# EAGLE board Arduino_Shield_6_5_19_REV4 (EAGLE 9.3.1)
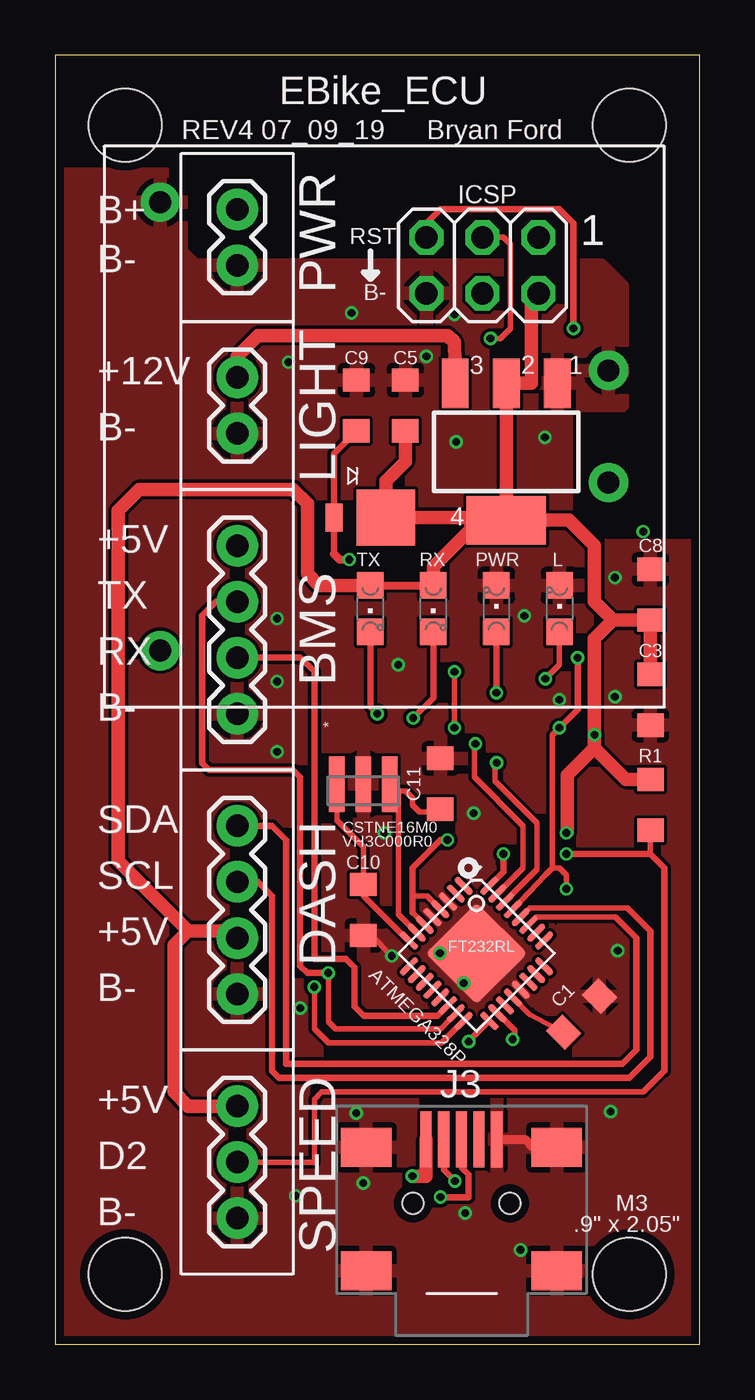
[diagram p0: board, top side]
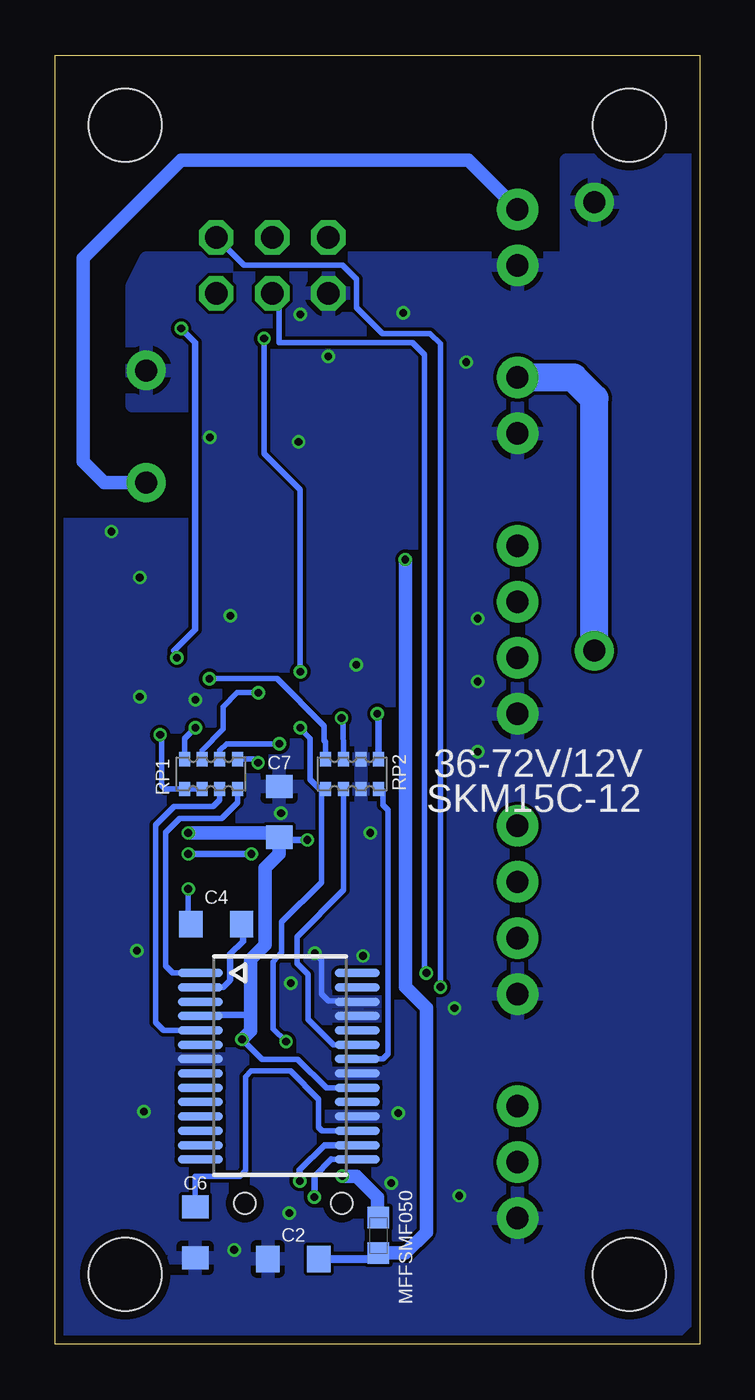
[diagram p1: board, bottom side, seen from below]

Size 29.21 x 58.42 mm. Coordinates in mm from the lower left corner, seen from the top.
Outline: 0,0 29.21,0 29.21,58.42 0,58.42 0,0
Copper layers (1*16): Top 0.035559375mm / dielectric 1.6mm / Bottom 0.035559375mm
Design rules "oshpark-2layer *": minimum track width 6mil, minimum drill 10mil, track to track 6mil, track to pad 6mil, pad to pad 6mil, via to via 6mil, smd to smd 6mil, copper to edge 15mil, drill to drill 6mil, minimum pad ring 5mil, minimum via ring 5mil, stop-mask expansion 2.5mil, vias tented up to drill 0mil, thermal gap 10mil
Net classes: 1 POWER: width 0.762 mm, clearance 0.762 mm
Holes 3.3 mm at 3.17,55.24 3.17,3.17 26.04,3.17 26.04,55.24

## Footprints (pad centres in the part's own frame; a part is rotated, then mirrored left to right if it is on the bottom)
0805 = smd 1.054 x 1.2: 1 -1.154,0; 2 1.154,0
1X04 = drill 1.016 pad 1.88: 1 0,0; 2 2.54,0; 3 5.08,0; 4 7.62,0
1X03 = drill 1.016 pad 1.88: 1 0,0; 2 2.54,0; 3 5.08,0
1X02 = drill 1.016 pad 1.88: 1 0,0; 2 2.54,0
SCHOTTKY_DIODE_DO220AAL = smd 2.667 x 2.54: P$1 -0.7,0 | smd 0.762 x 1.27: P$2 1.65,0
0603 = smd 0.95 x 1: 1 -0.8,0; 2 0.8,0
USB_SSOP28 = smd 0.381 x 2.032: 1 0,0; 2 0.65,0; 3 1.3,0; 4 1.95,0; 5 2.6,0; 6 3.25,0; 7 3.9,0; 8 4.55,0; 9 5.2,0; 10 5.85,0; 11 6.5,0; 12 7.15,0; 13 7.8,0; 14 8.45,0; 15 8.45,7.112; 16 7.8,7.112; 17 7.15,7.112; 18 6.5,7.112; 19 5.85,7.112; 20 5.2,7.112; 21 4.55,7.112; 22 3.9,7.112; 23 3.25,7.112; 24 2.6,7.112; 25 1.95,7.112; 26 1.3,7.112; 27 0.65,7.112; 28 0,7.112
LINEAR_VREG_SOT223 = smd 1.219 x 2.235: 1 -2.311,-3.099; 2 0,-3.099; 3 2.311,-3.099 | smd 3.6 x 2.2: 4 0,3.099
VQFN32 = smd 1.016 x 0.279: 1 -2.577,1.75; 2 -2.577,1.25; 3 -2.577,0.75; 4 -2.577,0.25; 5 -2.577,-0.25; 6 -2.577,-0.75; 7 -2.577,-1.25; 8 -2.577,-1.75; 17 2.577,-1.75; 18 2.577,-1.25; 19 2.577,-0.75; 20 2.577,-0.25; 21 2.577,0.25; 22 2.577,0.75; 23 2.577,1.25; 24 2.577,1.75 | smd 0.279 x 1.016: 9 -1.75,-2.577; 10 -1.25,-2.577; 11 -0.75,-2.577; 12 -0.25,-2.577; 13 0.25,-2.577; 14 0.75,-2.577; 15 1.25,-2.577; 16 1.75,-2.577; 25 1.75,2.577; 26 1.25,2.577; 27 0.75,2.577; 28 0.25,2.577; 29 -0.25,2.577; 30 -0.75,2.577; 31 -1.25,2.577; 32 -1.75,2.577 | smd 3.254 x 3.254: 33 0,0
USB-MINI-B_2 = smd 0.508 x 2.54: 1 0,0; 2 0.8,0; 3 1.6,0; 4 2.4,0; 5 3.2,0 | smd 2.286 x 1.778: 6 -2.717,5.948; 7 -2.717,0.36; 8 5.918,0.36; 9 5.918,5.948 | hole 0.95: -0.6,2.9; 3.8,2.9
2X03 = drill 1.016 pad 1.55 octagon: 1 -2.54,-1.27; 2 -2.54,1.27; 3 0,-1.27; 4 0,1.27; 5 2.54,-1.27; 6 2.54,1.27
LED_0805 = smd 1.2 x 1.2: A 0,-1.05; C 0,1.05
CRISTALLI_RESONATOR = smd 0.7 x 2.5: 1 -1.2,-0.3; 2 0,-0.3; 3 1.2,-0.3
RESISTOR_ARRAY_CAY16 = smd 0.5 x 0.65: 1 -1.2,-0.675; 2 -0.4,-0.675; 3 0.4,-0.675; 4 1.2,-0.675; 5 1.2,0.675; 6 0.4,0.675; 7 -0.4,0.675; 8 -1.2,0.675
SKM15C-12_DCDC = drill 1 pad 1.778: +VIN 10.16,2.54; +VOUT 2.54,22.86; -VIN 15.24,2.54; -VOUT 22.86,22.86

## Placement (x,y rotation side)
C1  100nF  [0805]  23.86,14.96 45 top
C2  4.7uF_16V  [0805]  18.41,3.87 180 bottom
C3  1uF  [0805]  26.99,29.21 270 top
C4  100nF  [0805]  21.91,19.05 0 bottom
C5  4,7uF_16V  [0805]  15.88,42.55 90 top
C6  100nf  [0805]  22.86,5.08 270 bottom
C7  1uF  [0805]  19.05,24.13 90 bottom
C8  1uF  [0805]  26.99,33.97 90 top
C9  100nF  [0805]  13.65,42.55 90 top
C10  22pF  [0805]  13.97,19.68 270 top
C11  22pF  [0805]  17.46,25.4 90 top
CXTR_BMS  4PIN_.1"_CONNECTOR  [1X04]  8.26,36.2 270 top
CXTR_DASH  4PIN_.1"_CONNECTOR  [1X04]  8.26,15.88 90 top
CXTR_HALL_SENSOR  3PIN_.1"_CONNECTOR  [1X03]  8.26,10.79 270 top
CXTR_HEADLIGHT  2PIN_.1"_CONNECTOR  [1X02]  8.26,41.27 90 top
CXTR_POWER  2PIN_.1"_CONNECTOR  [1X02]  8.26,48.9 90 top
D1  SS1P3L  [SCHOTTKY_DIODE_DO220AAL]  14.29,37.47 180 top
F1  MF-FSMF050X-2  [0603]  14.55,4.94 90 bottom
IC1  FT232RL  [USB_SSOP28]  22.63,16.83 270 bottom
IC2  LM1117IMPX-5.0  [LINEAR_VREG_SOT223]  20.45,40.45 180 top
IC3  328P-MUR  [VQFN32]  19.1,17.72 315 top
J3  UJ2-MBH-1-SMT-TR  [USB-MINI-B_2]  20.02,9.28 180 top
J4  [2X03]  19.37,48.9 180 top
L  Green  [LED_0805]  22.86,33.34 0 top
PWR  Green  [LED_0805]  20,33.34 0 top
R1  4.99  [0805]  26.99,24.45 90 top
RESONATOR  CSTNE16M0VH3C000R0  [CRISTALLI_RESONATOR]  13.97,25.08 180 top
RP1  1K  [RESISTOR_ARRAY_CAY16]  22.15,25.84 180 bottom
RP2  1K  [RESISTOR_ARRAY_CAY16]  15.75,25.84 0 bottom
RX  Green  [LED_0805]  17.14,33.34 180 top
TX  Green  [LED_0805]  14.29,33.34 180 top
U$2  SKM15C-12_DCDC  [SKM15C-12_DCDC]  27.62,28.89 90 top

## Library data of the parts
C1 C4 C6 C9 = EBike_Project_Library; DESCRIPTION: Multilayer Ceramic Capacitors MLCC - SMD/SMT 0805 50V 0.1uF 10% X7R AEC-Q200; LINK: https://www.mouser.com/ProductDetail/Taiyo-Yuden/UMK212B7104KGHT?qs=sGAEpiMZZMs0AnBnWHyRQNbg85K4ab%2F3SCTzhAxY5ms%3D; PACKAGE: 0805; PART_NUMBER: UMK212B7104KGHT; PRICE: 0.073
C2 C5 = EBike_Project_Library; DESCRIPTION: Tantalum Capacitors - Solid SMD 16volts 4.7uF 20% Molded Case, 0805; LINK: https://www.mouser.com/ProductDetail/Vishay-Sprague/TMCP1C475MTRF?qs=sGAEpiMZZMuEN2agSAc2prL8TSVBEr4qhfGzNWmpY58%252BLcjxpCNYUg%3D%3D; PART_NUMBER: TMCP1C475MTRF; PRICE: 0.62
C3 C7 C8 = EBike_Project_Library; DESCRIPTION: Multilayer Ceramic Capacitors MLCC - SMD/SMT CGA 0805 16V 1uF X7R 10% AEC-Q200; LINK: https://www.mouser.com/ProductDetail/TDK/CGA4J2X7R1C105K125AA?qs=sGAEpiMZZMs0AnBnWHyRQEWjzA2rN6H9wYlJX5ghAes%3D; PACKAGE: 0805; PART_NUMBER: CGA4J2X7R1C105K125AA; PRICE: 0.08
C10 C11 = EBike_Project_Library; DESCRIPTION: Multilayer Ceramic Capacitors MLCC - SMD/SMT 0805 22pF 50volts C0G 2%; LINK: https://www.mouser.com/ProductDetail/Vishay-Vitramon/VJ0805A220GXACW1BC?qs=sGAEpiMZZMs0AnBnWHyRQGuekufMepD5iWN0yuUza%2Fg%3D; PACKAGE: 0805; PART_NUMBER: VJ0805A220GXACW1BC; PRICE: 0.19
CXTR_BMS CXTR_DASH = EBike_Project_Library; DESCRIPTION: Headers & Wire Housings VERTICAL HDR 4P single row; LINK: https://www.mouser.com/ProductDetail/Molex/70543-0003?qs=%2Fha2pyFaduhkrELsSyc%252BzEvQtAM%2F8u3WZn5u47QKSoI%3D; PART_NUMBER: 70543-0003; PRICE: 0.99
CXTR_HALL_SENSOR = EBike_Project_Library; DESCRIPTION: Headers & Wire Housings VERTICAL HDR 3P single row; LINK: https://www.mouser.com/ProductDetail/Molex/70543-0002?qs=sGAEpiMZZMtVoztFdqDXO7H2KtVwxa9m; PART_NUMBER: 70543-0002; PRICE: 0.92
CXTR_HEADLIGHT CXTR_POWER = EBike_Project_Library; DESCRIPTION: Headers & Wire Housings VERTICAL HDR 2P single row; LINK: https://www.mouser.com/ProductDetail/Molex/70543-0001?qs=sGAEpiMZZMtVoztFdqDXOwZ%252B3K3gi96X; PART_NUMBER: 70543-0001; PRICE: 0.84
D1 = EBike_Project_Library; DESCRIPTION: 1A 30V Schottky Barrier Rectifiers -SS1P3L-M3/84A; LINK: https://www.mouser.com/ProductDetail/Vishay-Semiconductors/SS1P3L-M3-84A?qs=sGAEpiMZZMtQ8nqTKtFS%2FDwK3YsqAmRDX68SX%2Fa33dQ%3D; PACKAGE: DO220AAL; PART_NUMBER: SS1P3L-M3/84A; PRICE: 0.44
F1 = EBike_Project_Library; DESCRIPTION: Resettable Fuses - PPTC 6volts 40amps. Trip: 1 Amp; LINK: https://www.mouser.com/ProductDetail/Bourns/MF-FSMF050X-2?qs=%2Fha2pyFaduhY1ZPPOVrCdcS5aENsc7ePUQjWSxVAdbE%3D; PACKAGE: 0603; PART_NUMBER: MF-FSMF050X-2; PRICE: 0.8
IC1 = EBike_Project_Library; DESCRIPTION: USB to serial UART interface -FT232RL; LINK: https://www.mouser.com/ProductDetail/FTDI/FT232RL-REEL?qs=sGAEpiMZZMs5ceO8zL%252BTxyQLQIH6hE7q; PACKAGE: SSOP28; PART_NUMBER: FT232RL; PRICE: 4.5
IC2 = EBike_Project_Library; DESCRIPTION: LDO Voltage Regulators 800MA; LINK: https://www.mouser.com/ProductDetail/Texas-Instruments/LM1117IMPX-50-NOPB?qs=sGAEpiMZZMsGz1a6aV8DcCERHZHPu4lvRjG0WFCuZBk%3D; PACKAGE: SOT-223-4; PART_NUMBER: LM1117IMPX-5.0/NOPB; PRICE: 1.1
IC3 = EBike_Project_Library; DESCRIPTION: ATMEGA328P 8-bit Microcontroller with 32KBytes In-System Programmable Flash ATMEGA328P-AU; LINK: https://www.mouser.com/ProductDetail/Microchip-Technology-Atmel/ATMEGA328P-MUR?qs=6Dg1WZIWLC7u6Xm9ddn7Uw%3D%3D&gclid=CjwKCAjw04vpBRB3EiwA0IieaksvOVTdJjfP02M7Zuqh5oYF5-gaqRzNhihrY83d8rV5YqceIOQAwRoCJZYQAvD_BwE; PACKAGE: VQFN32; PART_NUMBER: ATMEGA328P-MUR; PRICE: 2.14
J3 = EBike_Project_Library; DESCRIPTION: USB Connectors USB 2.0 mini B jack 5 pin Horizontal SMT; LINK: https://www.mouser.com/ProductDetail/CUI/UJ2-MBH-1-SMT-TR?qs=sGAEpiMZZMulM8LPOQ%252Byk%252Br6FietFiXBYOK8b9%2FsuNIy0pbKqeLWLA%3D%3D; PACKAGE: USB-MINI-B_2; PART_NUMBER: UJ2-MBH-1-SMT-TR; PRICE: 0.49
J4 = EBike_Project_Library; DESCRIPTION: 2X03 Array of 0.1" Headers
L PWR RX TX = EBike_Project_Library; DESCRIPTION: LED GREEN - SMD-0805; LINK: https://www.mouser.com/ProductDetail/Kingbright/APT2012CGCK?qs=sGAEpiMZZMseGfSY3csMkfJS7xWFNN5n7tzB45f%252BgXY%3D; PACKAGE: 0805; PART_NUMBER: APT2012CGCK; PRICE: 0.176
R1 = EBike_Project_Library; DESCRIPTION: Thick Film Resistors 1/8Watt 4.99Kohms 1% Commercial Use; LINK: https://www.mouser.com/ProductDetail/Vishay-Dale/CRCW08054K99FKEAC?qs=sGAEpiMZZMvdGkrng054t0DrEhLhGh8g%2F7ymnn7FEGW0GG%2FpsF6WEQ%3D%3D; PACKAGE: 0805; PART_NUMBER: CRCW08054K99FKEAC; PRICE: 0.1
RESONATOR = EBike_Project_Library; DESCRIPTION: Resonators 16.0000MHz 15pF SMD CHP Rsntr 0.07% AUTO; LINK: https://www.mouser.com/ProductDetail/Murata-Electronics/CSTNE16M0VH3C000R0?qs=sGAEpiMZZMsBj6bBr9Q9aVicrFFkOfIYpHW0AbRuFJ01rdD3nNN31g%3D%3D; PACKAGE: CUSTOM; PART_NUMBER: CSTNE16M0VH3C000R0; PRICE: 0.44
RP1 RP2 = EBike_Project_Library; DESCRIPTION: Resistor Networks & Arrays 1K 5% Convex 4resistors; LINK: https://www.mouser.com/ProductDetail/Bourns/CAY16-102J4LF?qs=%2Fha2pyFadug6W1fYoV%2Fz5iiiJqpMP3MDh5o065QEQ1wMYAScZ%252BDqEQ%3D%3D; PACKAGE: CAY16; PART_NUMBER: CAY16-102J4LF; PRICE: 0.1
U$2 = EBike_Project_Library; DESCRIPTION: Isolated DC/DC Converters 15W 36-75Vin 12Vout 125-1250mA 1x1 size; LINK: https://www.mouser.com/ProductDetail/MEAN-WELL/SKM15C-12?qs=%2Fha2pyFaduhh55LLYaK%2FKJ2VcEvgwt5xUEx7a8eNZIE%3D; PART_NUMBER: SKM15C-12; PRICE: 25.44

## Nets
3V3: C6.1 IC1.17
+5V: C3.1 C5.1 C7.1 C8.1 CXTR_DASH.2 CXTR_HALL_SENSOR.1 D1.P$1 IC1.4 IC1.20 IC2.2 IC2.4 IC3.4 IC3.6 IC3.18 J4.2 R1.2 RP1.5 RP1.6 RX.A TX.A
+12V: CXTR_HEADLIGHT.2 IC2.3 U$2.+VOUT
AREF: C1.1 IC3.20
B+: CXTR_POWER.2 U$2.+VIN
B-_ECU: C1.2 C2.2 C3.2 C5.2 C6.2 C7.2 C8.2 C9.2 C10.2 C11.2 CXTR_BMS.4 CXTR_DASH.1 CXTR_HALL_SENSOR.3 CXTR_HEADLIGHT.1 CXTR_POWER.1 IC1.7 IC1.18 IC1.21 IC1.25 IC1.26 IC2.1 IC3.3 IC3.5 IC3.21 IC3.33 J3.1 J3.6 J3.7 J3.8 J3.9 J4.6 L.C PWR.C RESONATOR.2 RP2.3 RP2.6 U$2.-VIN U$2.-VOUT
D0/RX: IC3.30 RP1.1
D1/TX: IC3.31 RP1.2
D2_HALL: CXTR_HALL_SENSOR.2 IC3.32 R1.1
D12/MISO: IC3.16 J4.1
D13/SCK: IC3.17 J4.3 RP2.1
LCD_SCL_BLUE_A5: CXTR_DASH.3 IC3.28
LCD_SDA_GREEN_A4: CXTR_DASH.4 IC3.27
N$4: C4.2 IC1.2
N$7: IC1.15 J3.3
N$8: IC1.16 J3.4
N$10: PWR.A RP1.3
N$12: IC1.23 RP2.2
N$13: IC1.22 RP2.4
N$14: C11.1 IC3.7 RESONATOR.1
N$18: L.A RP2.8
N$19: RP2.5 TX.C
N$20: C10.1 IC3.8 RESONATOR.3
N$26: F1.2 J3.5
N$29: RP2.7 RX.C
RESET: C4.1 IC3.29 J4.5 RP1.4
RX: IC1.1 RP1.8
RX_NANO_D10: CXTR_BMS.3 IC3.14
TX: IC1.5 RP1.7
TX_NANO_D11: CXTR_BMS.2 IC3.15 J4.4
VUSB: C2.1 C9.1 D1.P$2 F1.1

## Tracks (layer width: path | path; a pad name or v marks a point on that pad's centre or on a via)
3V3
  Bottom 0.254: IC1.17 17.11,9.68 17.27,9.84 17.27,11.11 18.54,12.38 20.32,12.38 20.57,12.13 20.57,7.87 20.83,7.62 22.86,7.62 C6.1
+5V  (via drill 0.35 pad 0.6)
  Top 0.254: v20.74,13.82 20.84,13.92 20.84,14.22 20.05,15.01 IC3.18 | IC3.6 | IC3.6 16.19,19.56 | IC3.4 16.85,20.32 16.19,20.32
  Top 0.305: 16.19,19.56 16.19,20.32 16.19,21.59 17.46,22.86 v17.78,22.86
  Top 0.356: TX.A RX.A
  Top 0.61: 24.45,27.03 23.22,25.79 23.22,23.22 v23.18,23.18 | 24.45,27.03 v24.45,27.62 24.45,31.98 25.28,32.82 | IC2.4 23.29,37.35 24.45,36.2 24.45,33.66 25.28,32.82 | IC2.4 18.85,37.35 | 18.85,37.35 18.85,36.94 17.14,35.24 RX.A | IC2.4 IC2.2 21.59,43.55 21.59,47.31 J4.2 | 6.03,18.73 2.86,21.91 2.86,37.78 3.81,38.73 10.79,38.73 11.43,38.1 11.43,34.92 11.97,34.39 TX.A | CXTR_DASH.2 7.94,18.73 6.03,18.73 | 6.03,18.73 5.4,18.1 5.4,11.43 6.03,10.79 CXTR_HALL_SENSOR.1 | C3.1 C8.1 25.28,32.82 | 24.45,27.03 25.87,25.6 R1.2 | 18.85,37.35 18.73,37.47 D1.P$1 14.99,39.12 15.88,40.01 C5.1
  Bottom 0.254: v24.45,27.62 24.38,27.56 24.38,25.34 24.22,25.17 RP1.5 RP1.6 | IC1.20 16.92,11.63 18.21,12.92 19.84,12.92 v20.74,13.82 | IC1.4 22.61,14.88 22.56,14.92
  Bottom 0.305: 22.56,14.92 20.55,14.92 20.35,14.82 | C7.1 18.93,22.86 v17.78,22.86
  Bottom 0.61: v20.74,13.82 20.35,14.22 20.35,14.82 20.35,17.44 19.68,18.1 19.68,21.59 19.05,22.23 C7.1 19.25,23.18 v23.18,23.18
+12V
  Top 0.61: IC2.3 18.09,45.41 17.78,45.72 9.21,45.72 8.26,44.77 CXTR_HEADLIGHT.2
  Bottom 1.27: U$2.+VOUT 4.76,42.86 5.71,43.81 CXTR_HEADLIGHT.2
AREF
  Top 0.254: C1.1 21.5,14.96 IC3.20
B+
  Bottom 0.61: CXTR_POWER.2 10.48,53.66 23.5,53.66 27.94,49.21 27.94,40.01 26.99,39.05 U$2.+VIN
B-_ECU  (via drill 0.35 pad 0.6)
  Top 0.254: v15.26,17.61 14.33,18.53 C10.2
  Top 0.406: J3.1 21.31,9.28 21.67,8.93 23.37,8.93 23.36,8.92 J3.7
  Bottom 0.254: IC1.26 15.55,15.56 16.83,15.56 17.14,15.88 17.14,17.43 v17.44,17.72
  other vias: 22.2,41.1 18.17,40.89 15.56,30.8 26.66,36.83 21.09,4.28 11.11,15.24 18.52,16.37 18.59,5.95 25.5,17.84 13.44,46.74 21.27,33.02 10.06,30.04 10.06,32.89 10.06,26.86 18.1,46.67 16.83,44.77 18.97,24.07 13.97,7.3 25.18,10.54 10.9,6.73 10.58,44.51 25.37,29.35 25.37,34.75 14.92,23.18 13.65,10.48 22.86,29.21
  pour Top (no thermals): 14.92,18.73 18.1,21.91 19.68,21.91 23.18,18.41 23.18,16.83 19.37,13.02 17.78,13.02 14.92,15.88
  pour Bottom: 0,53.66 6.03,53.66 6.03,49.21 25.08,49.21 25.72,47.94 25.72,42.55 23.18,42.55 23.18,37.47 23.5,37.15 29.84,37.15 30.16,36.83 30.16,1.27 29.21,0.32 1.27,0.32 0,1.59
  pour Top: 0,53.02 5.08,53.02 5.71,52.39 5.71,49.53 6.35,48.9 10.16,48.9 24.77,48.9 25.72,47.94 25.72,42.55 23.18,42.55 23.18,36.83 23.81,36.2 30.16,36.2 30.16,-0.32 29.53,-0.95 0.32,-0.95 -0.32,-0.32 -0.32,52.7
D0/RX  (via drill 0.35 pad 0.6)
  Top 0.254: v20.01,26.35 19.94,26.28 19.94,25.53 21.84,23.63 21.84,21.52 IC3.30
  Bottom 0.254: RP1.1 20.18,26.52 v20.01,26.35
D1/TX  (via drill 0.35 pad 0.6)
  Top 0.254: v19.05,27.22 19,27.16 19,25.7 21.21,23.5 21.21,21.59 IC3.31
  Bottom 0.254: RP1.2 21.75,26.91 21.44,27.22 v19.05,27.22
D2_HALL  (via drill 0.35 pad 0.6)
  Top 0.254: 27.62,12.38 26.67,11.43 12.06,11.43 11.75,11.11 11.75,8.26 CXTR_HALL_SENSOR.2 | 26.99,22.23 R1.1 | IC3.32 19.6,20.69
  Top 0.305: 19.6,20.69 20.32,21.41 v20.32,22.23 | v23.18,22.23 26.99,22.23 27.62,21.59 27.62,12.38
  Bottom 0.305: v20.32,22.23 v23.18,22.23
D12/MISO  (via drill 0.35 pad 0.6)
  Top 0.254: v11.75,16.19 11.75,14.29 12.38,13.65 17.51,13.65 IC3.16
  Bottom 0.254: v11.75,16.19 11.77,16.21 11.75,16.23 11.75,45.34 12.21,45.81 14.38,45.81 15.56,46.99 15.56,48.26 16.19,48.9 20.64,48.9 J4.1
D13/SCK  (via drill 0.35 pad 0.6)
  Top 0.254: J4.3 20.32,50.16 20.64,49.85 20.64,46.04 20.18,45.58 v19.74,45.58 | v18.1,27.94 v18.1,30.48 | 19.6,14.58 19.61,14.58 IC3.17
  Top 0.305: v18.74,13.72 19.6,14.58
  Bottom 0.254: RP2.1 17.14,25.17 | 17.14,25.17 17.23,25.17 17.65,25.59 17.65,27.46 18.12,27.92 v18.1,27.94 | 17.14,25.17 17.14,20.94 18.94,19.15 18.94,17.76 19.32,17.32 19.32,14.3 v18.74,13.72 | v18.1,30.48 18.1,38.73 19.74,40.37 v19.74,45.58
LCD_SCL_BLUE_A5
  Top 0.254: 21.51,19.77 25.95,19.77 26.99,18.73 | IC3.28 21.51,19.77 | 21.51,19.77
  Top 0.305: 26.99,18.73 26.99,13.02 26.04,12.06 10.16,12.06 9.84,12.38 9.84,20.32 9.21,20.95 CXTR_DASH.3
LCD_SDA_GREEN_A4
  Top 0.254: 26.35,18.41 25.4,19.37 21.81,19.37 IC3.27
  Top 0.305: 26.35,18.41 26.35,13.34 25.72,12.7 10.48,12.7 10.48,22.86 9.84,23.5 CXTR_DASH.4
N$4
  Bottom 0.254: IC1.2 21.61,16.18 21.34,16.45 | C4.2 20.75,18.79 20.7,18.73
  Bottom 0.305: 21.34,16.45 21.27,16.51 21.27,17.69 20.7,18.26 20.7,18.73
N$7  (via drill 0.35 pad 0.6)
  Top 0.254: 18.73,7.7 18.41,8.01 J3.3
  Top 0.305: v17.46,6.67 18.73,6.67 18.73,7.7
  Bottom 0.254: IC1.15 16.7,8.38
  Bottom 0.305: v17.46,6.67 17.46,7.62 16.7,8.38
N$8  (via drill 0.35 pad 0.6)
  Top 0.305: v18.13,7.4 17.61,7.91 J3.4
  Bottom 0.305: v18.13,7.4 18.13,7.91 17.01,9.03 IC1.16
N$10  (via drill 0.35 pad 0.6)
  Top 0.305: PWR.A v20,29.53
  Bottom 0.254: RP1.3 22.55,26.92 21.59,27.88 21.59,28.89 20.95,29.53 v20,29.53
N$12
  Bottom 0.254: RP2.2 16.13,25.15 16.13,20.58 18.24,18.47 18.24,17.27 17.74,16.77 17.74,14.72 16.59,13.58 IC1.23
  Bottom 0.305: IC1.23
N$13
  Bottom 0.254: IC1.22 14.34,12.93 14.12,13.17 14.12,24.22 14.13,24.22 14.35,24.45 14.35,25.1 RP2.4
N$14
  Top 0.254: IC3.7 15.56,19.49 15.56,25 RESONATOR.1 15.47,25.08 15.88,25.08 16.19,24.77 16.19,24.45 16.51,24.13 17.35,24.13 C11.1
N$18  (via drill 0.35 pad 0.6)
  Top 0.254: L.A 22.86,30.8 v22.23,30.16
  Bottom 0.254: RP2.8 16.95,27.3 17.02,27.37 17.02,28.03 19.15,30.16 v22.23,30.16
N$19  (via drill 0.35 pad 0.6)
  Top 0.305: TX.C 14.29,28.89 v14.61,28.57
  Bottom 0.305: RP2.5 14.55,28.52 v14.61,28.57
N$20
  Top 0.254: RESONATOR.3 12.77,23.74 13.97,22.54 C10.1 13.97,20.32 15.99,18.3 IC3.8
N$26  (via drill 0.35 pad 0.6)
  Top 0.61: J3.5 16.82,7.62 v16.19,7.62
  Bottom 0.356: F1.2 14.61,5.79
  Bottom 0.61: 14.61,5.79 14.61,6.67 15.56,7.62 v16.19,7.62
N$29  (via drill 0.35 pad 0.6)
  Top 0.305: v16.23,28.38 17.14,29.3 RX.C
  Bottom 0.254: RP2.7 16.16,28.26 v16.23,28.38
RESET  (via drill 0.35, 0.35 pad 0.6)
  Top 0.254: IC3.29 22.23,21.27 22.54,21.59 | 22.54,21.59 22.86,21.59 23.18,21.27 v23.18,20.64 | v22.86,27.94 22.54,27.62 22.54,21.59
  Top 0.305: v23.5,46.04 23.5,50.8 22.86,51.44 17.46,51.44 16.83,50.8 J4.5 | v23.69,31.11 23.69,28.77 v22.86,27.94
  Bottom 0.254: RP1.4 23.35,27.45 v22.86,27.94 | C4.1 23.18,19.68 v23.18,20.64
  Bottom 0.305: v23.5,46.04 22.86,45.4 22.86,32.38 23.81,31.43 23.69,31.31 v23.69,31.11
RX
  Bottom 0.254: IC1.1 23.88,16.83 24.21,17.16 24.21,23.2 23.57,23.84 21.67,23.84 20.95,24.55 RP1.8
RX_NANO_D10
  Top 0.305: CXTR_BMS.3 11.11,31.11 11.75,30.48 11.75,17.46 13.19,17.46 13.57,17.08 13.57,15.32 14.01,14.88 17.33,14.88 IC3.14
TX
  Bottom 0.254: IC1.5 24.3,14.23 24.66,14.59 24.66,23.53 23.82,24.37 22.05,24.37 21.75,24.67 RP1.7
TX_NANO_D11  (via drill 0.35 pad 0.6)
  Top 0.254: v12.38,16.83 12.38,14.61 12.7,14.29 17.48,14.29 IC3.15
  Top 0.305: v12.38,16.83 11.43,16.83 11.11,17.14 11.11,25.72 10.79,26.04 6.99,26.04 6.67,26.35 6.67,33.02 7.3,33.66 CXTR_BMS.2
  Bottom 0.254: v12.38,16.83 12.47,16.92 12.47,44.86 13.02,45.4 19.05,45.4 19.05,47.31 J4.4
VUSB  (via drill 0.35 pad 0.6)
  Top 0.305: 12.64,35.81 D1.P$2 12.64,40.38 C9.1
  Top 0.356: v13.34,35.56 12.89,35.56 12.64,35.81
  Bottom 0.356: C2.1 14.82,3.87 F1.1
  Bottom 0.61: F1.1 13.32,4.14 12.38,5.08 12.38,15.24 13.34,16.19 v13.34,35.56

## Text on the board
tPlace: EBike_ECU | REV4 07_09_19 | Bryan Ford | ICSP | 1 | * | VH3C000R0
bPlace: MFFSMF050
tNames: B+ | RST | B- | PWR | B- | +12V | B- | LIGHT | +5V | TX | RX | BMS | B- | SDA | CSTNE16M0 | SCL | +5V | FT232RL | DASH | B- | ATMEGA328P | +5V | D2 | M3 | B- | .9" x 2.05" | SPEED
bNames: 36-72V/12V | SKM15C-12
test-probe: NANO / TEST POINTS | 10 | 9 | 8 | 7 | 6 | 5 | 4 | 3 | 2 | GND1 | RESET | 0 | 1 | USB_D- | USB_D+ | USB_GND | ISP1_5 | ISP1_4 | ISP1_3 | USB_5V | ISP1_1 | 3V3 | AREF | A0 | A1 | A2 | A3 | A4 | A5 | A6 | A7 | 5V_REF | DC_VIN- | DC_VIN+